# Altium PCB cc2530.PcbDoc
Units mil, origin at the board's own origin, x right, y up, seen from the top; angles counter-clockwise.
Board outline 3937.01 x 2362.2 mil, 2 copper layers (Top Layer, Bottom Layer); 66 components, 49 nets, 234 pads, 105 vias.
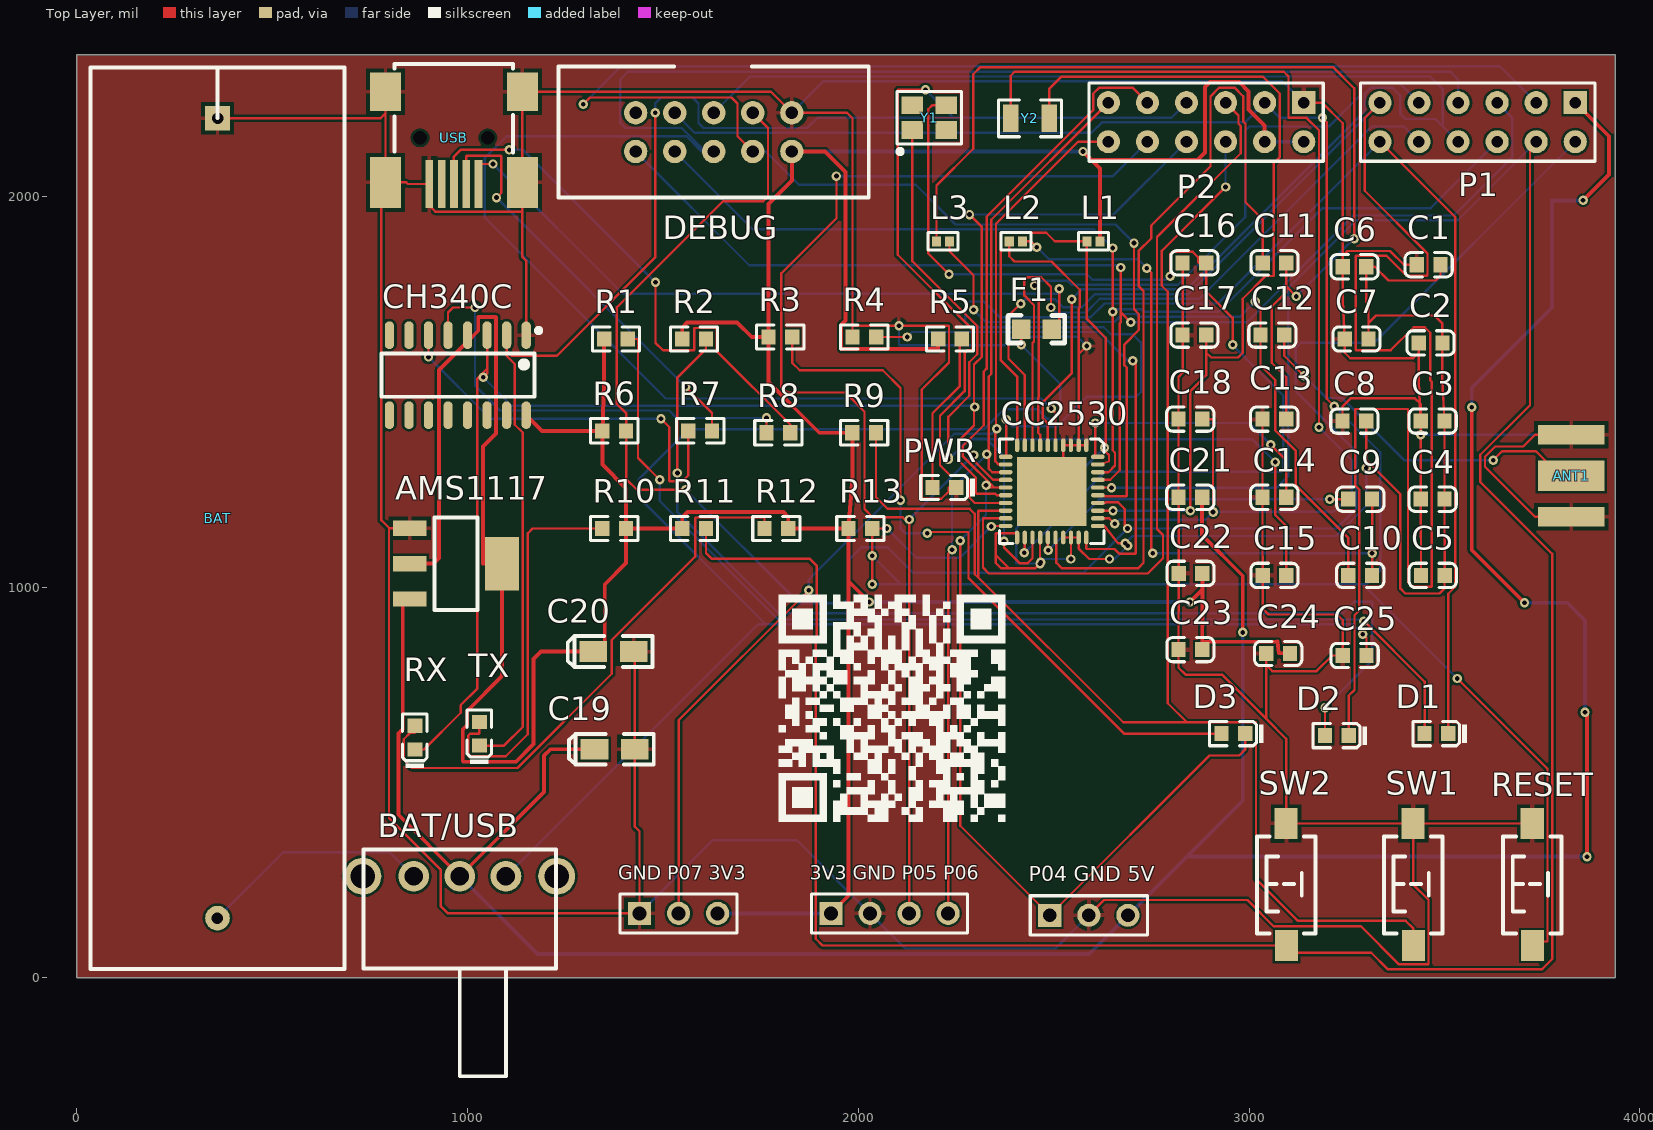
[diagram p0: Top Layer view]
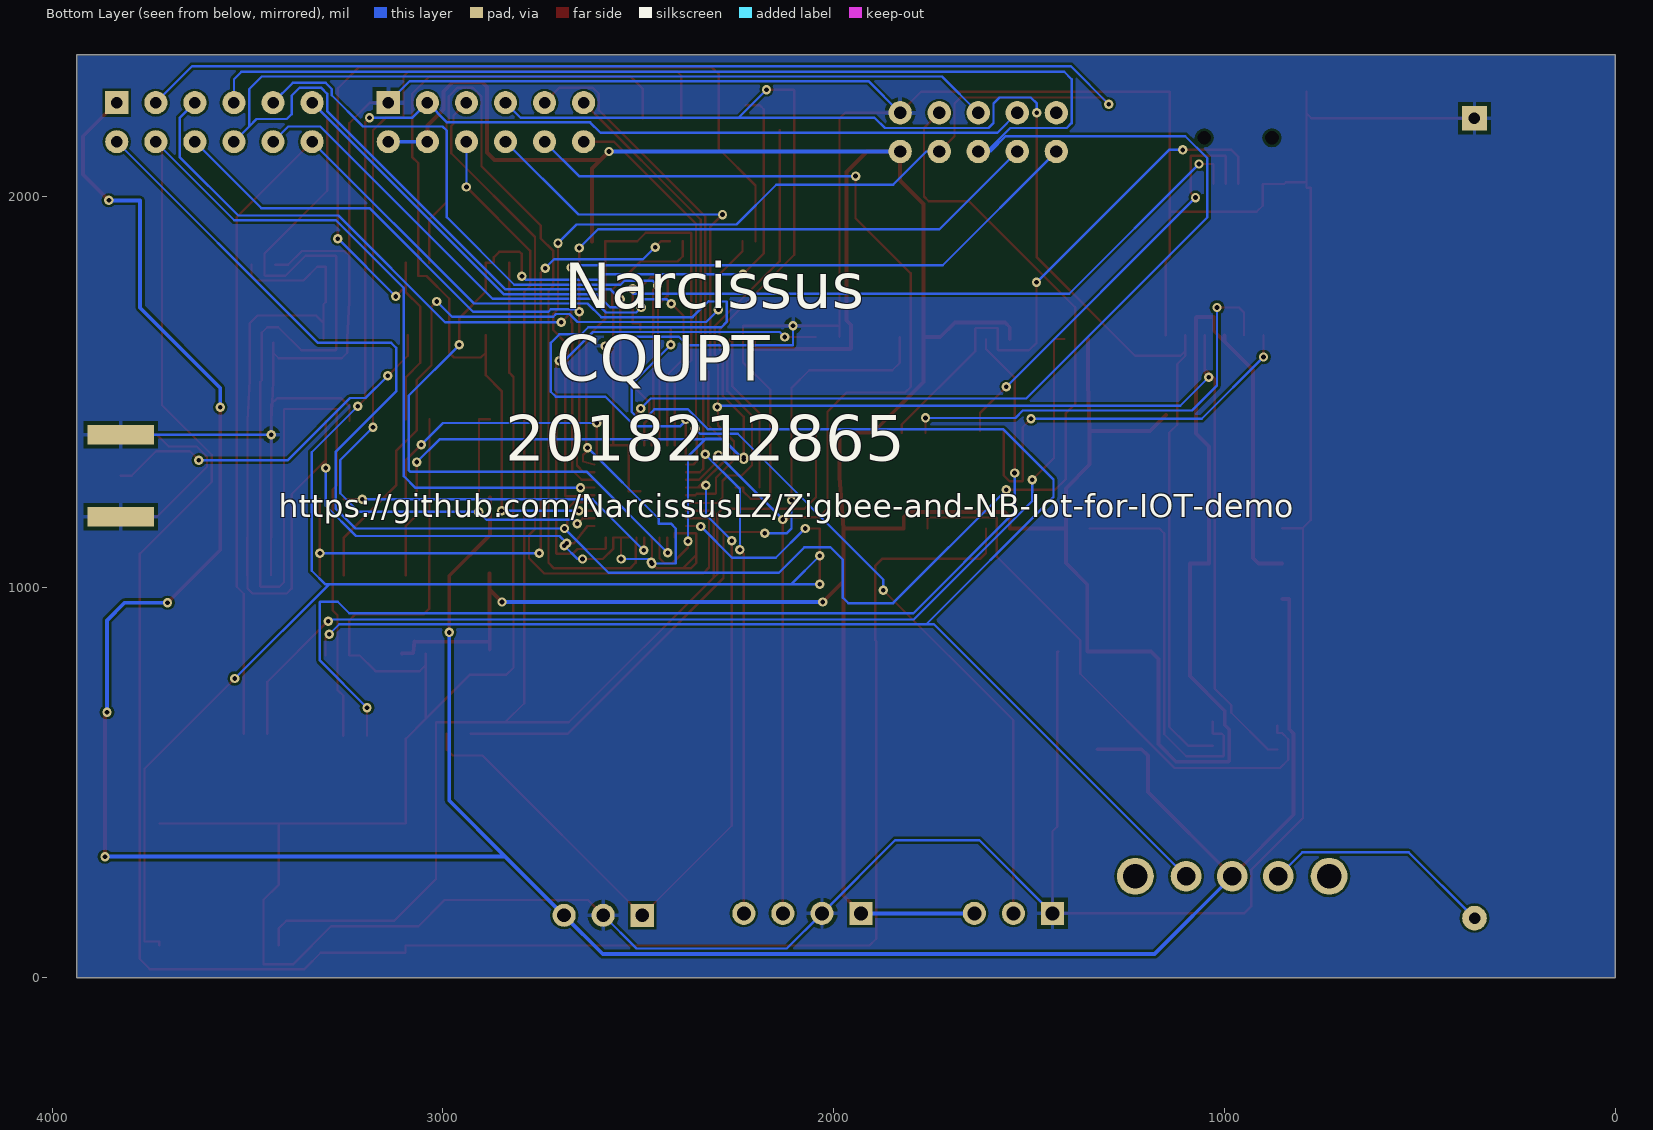
[diagram p1: Bottom Layer view, seen from below]
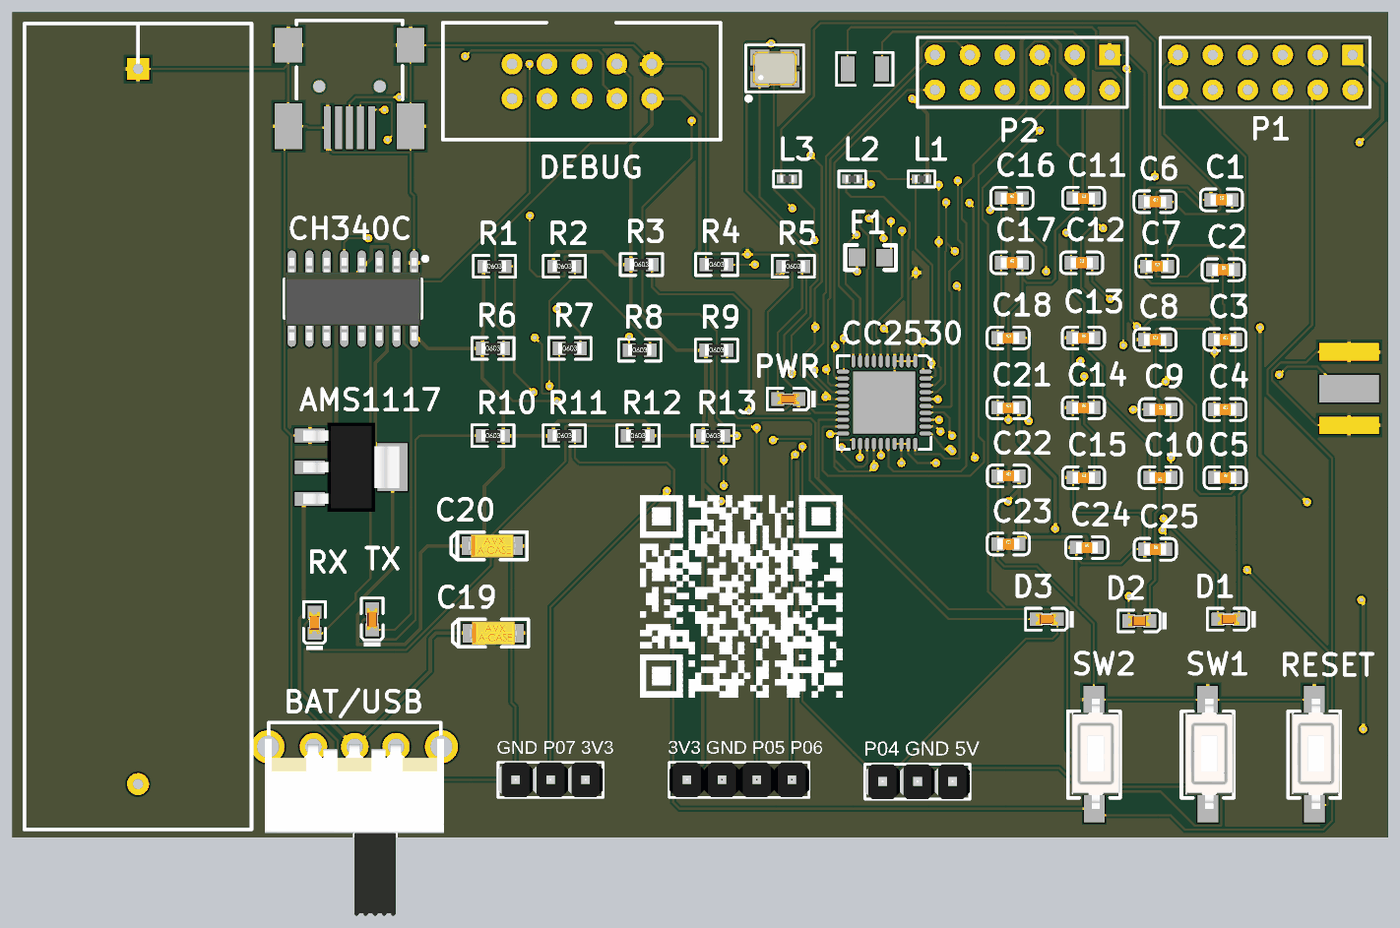
[diagram p2: 3D render of the assembled board from above, using the file's embedded part models]

## Layer stack, top to bottom
Top Solder: solder mask 0.4, Solder Resist, Dk 3.5
Top Layer: signal copper 1.4
Dielectric 1: dielectric 12.6, FR-4, Dk 4.8
Bottom Layer: signal copper 1.4
Bottom Solder: solder mask 0.4, Solder Resist, Dk 3.5

## Board outline
0,0 3937.01,0 3937.01,2362.2 0,2362.2

## Design rules (kind name [scope] priority, off if disabled: settings)
Clearance [All] p1: gap=6 ignorepadtopadclearanceinfootprint=FALSE
PolygonConnect [All] p1: connectstyle=Relief reliefconductorwidth=10 reliefentries=4 polygonreliefangle="90 Angle" airgapwidth=10
RoutingVias [All] p1: holewidth=12 width=24 viastyle="Through Hole" minholewidth=10 minwidth=20 maxholewidth=15 maxwidth=30
SolderMaskExpansion [All] p1: expansion=4
Width Width_1 [(InNet('3V3') OR InNet('5V') )] p1: maxlimit=10 minlimit=10 preferedwidth=10
Width [All] p2: maxlimit=10 minlimit=6 preferedwidth=6
30 further rules are at their usual default settings.

## Components (designator, comment, footprint, x,y, rotation, side; value= is the part's Value field where it differs from the comment)
"3V3 GND P05 P06" "气体感应" HDR1X4 1930,165 r0 top (schematic designator J2)
AMS1117 "AMS1117-3.3" SOT-223 970,1060 r180 top (schematic designator AMS)
ANT1 "SMA" SMA-KE 3825,1285 r180 top
BAT "bat" BAT 684.8,22.83 r90 top
BAT/USB "SS-12F23" SS-12F23 980,260 r270 top (schematic designator S1)
C1 "100nF" 0603_C 3459.69,1825 r0 top
C2 "100nF" 0603_C 3464.69,1625 r0 top
C3 "100nF" 0603_C 3470,1425 r0 top
C4 "220pF" 0603_C 3470,1225 r0 top
C5 "100nF" 0603_C 3470.31,1030 r0 top
C6 "2.2uF" 0603_C 3270,1820 r0 top
C7 "1uF" 0603_C 3275.31,1635 r0 top
C8 "100nF" 0603_C 3269.69,1425 r0 top
C9 "18pF (180) 5% 50V" 0603_C 3284.69,1225 r0 top
C10 "1.0pF" 0603_C 3284.69,1030 r180 top
C11 "18pF (180) 5% 50V" 0603_C 3065.32,1830 r0 top
C12 "2.2pF" 0603_C 3059.68,1645 r0 top
C13 "1.0pF" 0603_C 3064.68,1430 r0 top
C14 "1uF" 0603_C 3064.68,1230 r0 top
C15 "27pF" 0603_C 3065.32,1030 r0 top
C16 "27pF" 0603_C 2860.32,1830 r0 top
C17 "15pF" 0603_C 2860.32,1645 r0 top
C18 "15pF" 0603_C 2849.68,1430 r0 top
C19 "10uF" CASE-A_3216 1376.57,585 r180 top
C20 "10uF" CASE-A_3216 1373.43,835 r180 top
C21 "100nF" 0603_C 2849.68,1230 r0 top
C22 "100nF" 0603_C 2850.32,1035 r0 top
C23 "100nF" 0603_C 2850,840 r0 top
C24 "0.01uF" 0603_C 3074.68,830 r0 top
C25 "100nF" 0603_C 3270.31,825 r0 top
CC2530 "CC2530F256" PVQFN-N40 2583.58,1363.05 r270 top
CH340C "CH340C" SOIC-16_150mil 975,1542.36 r180 top
D1 "白灯 0603" 0603_LED_S1 3479.69,625 r180 top
D2 "白灯 0603" 0603_LED_S1 3224.69,620 r180 top
D3 "白灯 0603" 0603_LED_S1 2959.69,625 r180 top
DEBUG "Debug" DEBUG10 1830,2214 r180 top (schematic designator P3)
F1 "6V 500MA" 0805 2457.6,1653.9 r0 top
"GND P07 3V3" "DHT11" HDR1X3 1440,165 r0 top (schematic designator J3)
L1 "2nH" 0402_L 2601.73,1885 r0 top
L2 "2nH" 0402_L 2403.27,1885 r0 top
L3 "2nH" 0402_L 2216.73,1885 r0 top
P1 "CON2x6" CON2X6 3835,2240 r180 top
P2 "CON2x6" CON2X6 3140,2240 r180 top
"P04 GND 5V" "光敏/继电器" HDR1X3 2490,160 r0 top (schematic designator J1)
PWR "红灯 0603" 0603_LED_S1 2220.32,1255 r180 top
R1 "1KΩ" 0603_R 1379.68,1635 r0 top
R2 "1KΩ" 0603_R 1579.68,1635 r0 top
R3 "1KΩ" 0603_R 1800.31,1640 r0 top
R4 "56KΩ (5602) ±1%" 0603_R 2015.31,1640 r0 top
R5 "1KΩ" 0603_R 2234.68,1635 r0 top
R6 "10KΩ" 0603_R 1375.31,1400 r0 top
R7 "0Ω" 0603_R 1595.31,1400 r0 top
R8 "0Ω" 0603_R 1795.31,1395 r0 top
R9 "10KΩ (1002) ±1%" 0603_R 2015,1395 r0 top
R10 "1KΩ (1001) ±1%" 0603_R 1375.31,1150 r0 top
R11 "10KΩ (1002) ±1%" 0603_R 1579.68,1150 r0 top
R12 "1KΩ (1001) ±1%" 0603_R 1790.31,1150 r0 top
R13 "10KΩ (1002) ±1%" 0603_R 2005.31,1150 r0 top
RESET "6x6x5" "TSW SMD-3*6*2.5" 3725,240 r90 top
RX "绿灯 0603" 0603_LED_S1 865,614.68 r90 top
SW1 "6x6x5" "TSW SMD-3*6*2.5" 3420,240 r90 top
SW2 "6x6x5" "TSW SMD-3*6*2.5" 3095,240 r90 top
TX "绿灯 0603" 0603_LED_S1 1030,624.68 r90 top
USB "Mini USB" "SMT-MINI USB" 965,2150 r270 top
Y1 "32MHZ" SMD-3225_4P 2181.69,2201.5 r0 top
Y2 "32.768KHz" "SMD-3215_2P FC - 135" 2439.21,2200 r180 top

## Footprints (in the part's own frame and the unit in brackets; to place one, negate y for a bottom-side part, rotate by r counter-clockwise, add the part's x,y. Pads: shape width x height; smd on the part's side, far side on the other; paste and mask are expansions set on the pad)
0402_L [mm]
  rect 0.6x0.65 smd mask+0.051: 1(-0.425,0) 2(0.425,0)
  silkscreen extent -0.98,-0.58 0.97,0.58, body extent -0.51,-0.26 0.54,0.26, height 0.36
0603_C [mm]
  rect 0.93x0.98 smd: 1(-0.77,0) 2(0.77,0)
  silkscreen extent -1.53,-0.79 1.54,0.79, body extent -0.8,-0.4 0.8,0.4, height 0.3
0603_LED_S1 [mm]
  rect 0.93x0.98 smd: A(0.77,0) K(-0.77,0)
  silkscreen extent -1.98,-0.79 1.54,0.79, body extent -0.8,-0.4 0.8,0.4, height 0.6
0603_R [mm]
  rect 0.93x0.98 smd: 1(-0.77,0) 2(0.77,0)
  silkscreen extent -1.53,-0.79 1.54,0.79, body extent -0.85,-0.4 0.85,0.4, height 0.56
0805 [mm]
  rect 1.2x1.27 smd: 1(-1.03,0.165) 2(0.95,0.155)
  silkscreen extent -1.89,-0.74 1.79,1.06, body extent -1.02,-0.46 0.98,0.79, height 0.5
BAT [mm]
  round 1.6 hole 0.75: 0(3.302,8.255)
  rect 1.6x1.6 hole 0.75: 1(55.3,8.25)
  silkscreen extent 0,0 58.6,16.51
CASE-A_3216 [mm]
  rect 1.8x1.35 smd: 1(1.31,0) 2(-1.31,0)
  silkscreen extent -2.54,-1 2.97,1, body extent -1.7,-0.84 1.7,0.84, height 1.71
CON2X6 [mm]
  rect 1.5x1.5 hole 0.75: 1(0,0)
  round 1.5 hole 0.75: 2(0,2.54) 3(2.54,0) 4(2.54,2.54) 5(5.08,0) 6(5.08,2.54) 7(7.62,0) 8(7.62,2.54) 9(10.16,0) 10(10.16,2.54) 11(12.7,0) 12(12.7,2.54)
  silkscreen extent -1.27,-1.27 13.97,3.81
DEBUG10 [mil]
  round 60 hole 31.5: 1(0,0) 2(0,99) 3(100,0) 4(100,99) 5(200,0) 6(200,99) 7(300,0) 8(300,99) 9(400,0) 10(400,99)
  silkscreen extent -197,-118 598,217
HDR1X3 [mm] "Connector; Header; 3 Position"
  rect 1.5x1.5 hole 0.9: 1(0,0)
  round 1.5 hole 0.9: 2(2.54,0) 3(5.08,0)
  silkscreen extent -1.27,-1.27 6.35,1.27, body extent -1.27,-1.27 6.35,1.27, height 8.38
HDR1X4 [mm] "Connector; Header; 4 Position"
  rect 1.5x1.5 hole 0.9: 1(0,0)
  round 1.5 hole 0.9: 2(2.54,0) 3(5.08,0) 4(7.62,0)
  silkscreen extent -1.27,-1.27 8.89,1.27, body extent -1.27,-1.27 8.89,1.27, height 8.38
PVQFN-N40 [mm]
  oval 0.889x0.28 smd: 1(0,0) 2(0,-0.5) 3(0,-1) 4(0,-1.5) 5(0,-2) 6(0,-2.5) 7(0,-3) 8(0,-3.5) 9(0,-4) 10(0,-4.5) 21(5.994,-4.5) 22(5.994,-4) 23(5.994,-3.5) 24(5.994,-3) 25(5.994,-2.5) 26(5.994,-2) 27(5.994,-1.5) 28(5.994,-1) 29(5.994,-0.5) 30(5.994,0)
  oval 0.28x0.889 smd: 11(0.748,-5.248) 12(1.248,-5.248) 13(1.748,-5.248) 14(2.248,-5.248) 15(2.748,-5.248) 16(3.248,-5.248) 17(3.748,-5.248) 18(4.248,-5.248) 19(4.748,-5.248) 20(5.248,-5.248) 31(5.248,0.749) 32(4.748,0.749) 33(4.248,0.749) 34(3.748,0.749) 35(3.248,0.749) 36(2.748,0.749) 37(2.248,0.749) 38(1.748,0.749) 39(1.248,0.749) 40(0.748,0.749)
  rect 4.5x4.5 smd: 41(2.998,-2.25)
  silkscreen extent -0.4,-5.65 6.4,1.15
SMA-KE [mil]
  rect 170x78.74 smd: 1(0,0)
  rect 170x50 all layers, no hole: 2(0,105) 3(0,-105)
"SMD-3215_2P FC - 135" [mm]
  rect 1x1.8 smd: 1(-1.25,0) 2(1.25,0)
  silkscreen extent -2.05,-1.2 2.05,1.2
SMD-3225_4P [mm]
  rect 1.4x1.15 smd: 1(-1.1,-0.8) 2(1.1,-0.8) 3(1.1,0.8) 4(-1.1,0.8)
  silkscreen extent -2.1,-2.35 2.1,1.7, body extent -1.6,-1.25 1.6,1.25, height 0.61
"SMT-MINI USB" [mm]
  rect 3.1x0.5 smd: 1(3,1.6) 2(3,0.8) 3(3,0) 4(3,-0.8) 5(3,-1.6)
  rect 3.3x2 smd: 6(2.9,-4.45) 8(2.9,4.45)
  rect 2.5x2 smd: 7(-3,-4.45) 9(-3,4.45)
  rect 0x0 hole 0.9: 10(0,2.2) 11(0,-2.2)
  silkscreen extent -4.8,-3.85 0.95,3.85
SOIC-16_150mil [mm]
  oval 0.6x1.8 smd: 1(-4.445,-2.6) 2(-3.175,-2.6) 3(-1.905,-2.6) 4(-0.635,-2.6) 5(0.635,-2.6) 6(1.905,-2.6) 7(3.175,-2.6) 8(4.445,-2.6) 9(4.445,2.6) 10(3.175,2.6) 11(1.905,2.6) 12(0.635,2.6) 13(-0.635,2.6) 14(-1.905,2.6) 15(-3.175,2.6) 16(-4.445,2.6)
  silkscreen extent -5.4,-3.05 4.97,1.4, body extent -4.95,-2.97 4.95,3.03, height 1.75
SOT-223 [mm]
  rect 2.2x1 smd: 1(3,-2.3) 2(3,0) 3(3,2.3)
  rect 2.2x3.5 smd: 2(-3,0)
  silkscreen extent -1.4,-3 1.4,3, body extent -3.49,-3.24 3.49,3.24, height 1.64
SS-12F23 [mm] "脚距3mm"
  round 2.4 hole 1.6: 0(0,6.3) 0(0,-6.3)
  round 2 hole 1.2: 1(0,3) 2(0,0) 3(0,-3)
  silkscreen extent -1.75,-6.25 13,6.25, body extent -0.61,-6.52 12.29,6.48, height 5.75
"TSW SMD-3*6*2.5" [mm] "3*6*2.5mm"
  rect 2x1.5 smd: 1(-3.996,-0.02) 2(3.937,0)
  silkscreen extent -3.21,-1.9 3.09,1.9, body extent -4,-1.88 4,1.62, height 2.59

## Part data
"3V3 GND P05 P06": library part CON4, "连接器"
AMS1117: library part "SOT-223 AMS1117-3.3", "低压差线性稳压(LDO)", Package=SOT-223, SuppliersPartNumber=C6186, ComponentLink1Description=供应商, ComponentLink1URL=http://www.szlcsc.com/product/details_6652.html, Supplier=LC
BAT/USB: library part SSW-1P, "1路波动开关"
C1 C2 C3 C5 C8 C14 C15 C16 C17 C18 C21 C22 C23 C24 C25: library part "0603 100nF (104) 10% 50V", "贴片电容", Package=0603, SuppliersPartNumber=C14663, ComponentLink1Description=供应商, ComponentLink1URL=http://www.szlcsc.com/product/details_15331.html, Supplier=LC
C4: library part "0603 220pF (221) 10% 50V", "贴片电容", Package=0603, SuppliersPartNumber=C1603, ComponentLink1Description=供应商, ComponentLink1URL=http://www.szlcsc.com/product/details_1955.html, Supplier=LC
C6 C12: library part "0603 2.2uF (225) 10% 16V", "贴片电容", Package=0603, SuppliersPartNumber=C23630, ComponentLink1Description=供应商, ComponentLink1URL=http://www.szlcsc.com/product/details_24366.html, Supplier=LC
C7: library part "0603 1uF (105) 10% 50V", "贴片电容", Package=0603, SuppliersPartNumber=C15849, ComponentLink1Description=供应商, ComponentLink1URL=http://www.szlcsc.com/product/details_16531.html, Supplier=LC
C9 C11: library part "0603 18pF (180) 5% 50V", "贴片电容", Package=0603, SuppliersPartNumber=C1647, ComponentLink1Description=供应商, ComponentLink1URL=http://www.szlcsc.com/product/details_1999.html, Supplier=LC
C10 C13: library part "0805 1.0pF (010) 0.25pF 50V", "贴片电容", Package=0805, SuppliersPartNumber=C14971, ComponentLink1Description=供应商, ComponentLink1URL=http://www.szlcsc.com/product/details_15644.html, Supplier=LC
C19 C20: library part "3216 10uF (106) 10% 16V", "钽电容", Package=3216, SuppliersPartNumber=C7171, ComponentLink1Description=供应商, ComponentLink1URL=http://www.szlcsc.com/product/details_7643.html, Supplier=LC
CC2530: library part CC2530
D1 D2 D3: library part "0603 白灯", "发光二极管", Package=0603, SuppliersPartNumber=C2290, ComponentLink1Description=供应商, ComponentLink1URL=http://www.szlcsc.com/product/details_2663.html, Supplier=LC
DEBUG: library part "Header 5X2", "Header, 5-Pin, Dual row"
F1: library part FUSE, "保险丝"
"GND P07 3V3" "P04 GND 5V": library part CON3, "连接器"
L1 L2 L3: library part "0402 2.7nH 0.3nH", "贴片电感", Package=0402, SuppliersPartNumber=C27123, ComponentLink1Description=供应商, ComponentLink1URL=http://www.szlcsc.com/product/details_27872.html, Supplier=LC
PWR: library part "0603 红灯", "发光二极管", Package=0603, SuppliersPartNumber=C2286, ComponentLink1Description=供应商, ComponentLink1URL=http://www.szlcsc.com/product/details_2659.html, Supplier=LC
R1 R2 R3 R5: library part "0603 1.1KΩ (1101) 1%", "贴片电阻", Package=0603, SuppliersPartNumber=C22764, ComponentLink1Description=供应商, ComponentLink1URL=http://www.szlcsc.com/product/details_23491.html, Supplier=LC
R4: library part "0603 56KΩ (5602) 1%", "贴片电阻", Package=0603, SuppliersPartNumber=C23206, ComponentLink1Description=供应商, ComponentLink1URL=http://www.szlcsc.com/product/details_23933.html, Supplier=LC
R6 R9 R11 R13: library part "0603 10KΩ (1002) 1%", "贴片电阻", Package=0603, SuppliersPartNumber=C25804, ComponentLink1Description=供应商, ComponentLink1URL=http://www.szlcsc.com/product/details_26547.html, Supplier=LC
R7 R8: library part "0603 0Ω (0R0) 1%", "贴片电阻", Package=0603, SuppliersPartNumber=C21189, ComponentLink1Description=供应商, ComponentLink1URL=http://www.szlcsc.com/product/details_21903.html, Supplier=LC
R10 R12: library part "0603 1KΩ (1001) 1%", "贴片电阻", Package=0603, SuppliersPartNumber=C21190, ComponentLink1Description=供应商, ComponentLink1URL=http://www.szlcsc.com/product/details_21904.html, Supplier=LC
RESET SW1 SW2: library part "TSW DIP-6x6_V", "侧按直插6x6轻触开关"
RX TX: library part "0603 绿灯", "发光二极管", Package=0603, SuppliersPartNumber=C72043, ComponentLink1Description=供应商, ComponentLink1URL=http://www.szlcsc.com/product/details_73152.html, Supplier=LC
USB: library part USB-1, "IC", Manufacturer Part Number="USB Plug P/N: MUSB-B5-S-VT-02", ComponentLink1Description="Manufacturer Link", Published=NOV.13,2009, Publisher1="Stephen Lui", Publisher2=Tianshen
Y1: library part "SMD-3225_4P  25MHZ 12PF 10PPM", "贴片晶振", Package=SMD-3225_4P, SuppliersPartNumber=C9006, ComponentLink1Description=供应商, ComponentLink1URL=http://www.szlcsc.com/product/details_9526.html, Supplier=LC
Y2: library part "SMD-3215_2P 32.768KHz 20ppm 12.5pF", "贴片晶振", Package=SMD-3215_2P, SuppliersPartNumber=C32346, ComponentLink1Description=供应商, ComponentLink1URL=http://www.szlcsc.com/product/details_33310.html, Supplier=LC
CH340C: 唯一出售店铺网址=https://shop463601444.tao, 技术支持，联系售后=封装库

## Via types
v1: diameter 24, hole 12, Top Layer to Bottom Layer, 105 vias

## Nets (pads, with @x,y where several pads share a name; then routed paths per layer and width w, separated by ;. In a path a pad name is that pad's centre, name@x,y a point inside that pad or via, vN(x,y) a via of type N, cw(c..) or ccw(c..) an arc to the next point about the centre after c; other vN are vias at no path point)
3V3: "3V3 GND P05 P06.1" "GND P07 3V3.3" AMS1117.2 C20.1 C22.2 C23.2 C24.2 CH340C.4 CH340C.16 DEBUG.2 L1.2 P2.2 P2.4 R1.1 R2.1 R3.1 R5.1 R6.1 R9.1 R10.2 R11.1 R12.2 R13.1 | length 11170
  Top Layer w10: AMS1117.2@851.89,1060 912.5,1060 927,1074.5 927,1555.98 CH340C.4@1000,1628.98 ; CH340C.4 CH340C.4@1000,1628.98 ; CH340C.16 1190,1400 R6.1 ; R1.1 1349.37,1521.37 R6.1 ; R2.1 1549.37,1665 1561.66,1677.29 1690,1677.29 1727.29,1640 R3.1 ; 1930,165 1975,210 1975,1015 ; v1(2028,962) 1975,1015 ; R5.1 2204.37,1610 2203.37,1609 1956.69,1609 1955.69,1610 1955.69,1671 1967,1682.31 1967,2062.5 1914.5,2115 DEBUG.2 1830,2041 1770,1981 R3.1 ; v1(2575,2115) 2597,2093 ; L1.2 2618.46,2071.54 2597,2093 ; v1(2849,962) 2880.63,993.63 ; C22.2 2880.63,993.63 ; P2.4 3040,2181 2999,2222 2999,2268.53 2975,2292.53 2900,2292.53 2887.47,2280 2887.47,2112.5 2867.97,2093 2597,2093 ; C24.2 3076,831 3073,861 2880.38,860 ; CH340C.4@1000,1628.98 1027.19,1656.17 1027.19,1690 1028.35,1691.16 1071.65,1691.16 1072.81,1690 1072.81,1393.57 1039.13,1359.88 1039.13,1060.5 1039.63,1060 1088.11,1060 1088.11,772.42 999,683.31 999,646.97 987.71,635.68 987.71,554.35 989,553.06 1124.06,553.06 1169,598 1169,816.5 1187.5,835 C20.1 1351,835 1351,1007 1405.63,1061.63 R10.2 ; R6.1 1345,1313.48 1405.63,1252.85 R10.2 ; R10.2 R11.1 1549.37,1179 1562.66,1192.29 1808.34,1192.29 1820.63,1180 R12.2 R13.1 ; R3.1 1770,1525 1900,1395 R9.1 1984.69,1281.69 R13.1 ; 1975,1015 R13.1 ; 2880.38,860 2880.32,860 C23.2 2880.38,860 ; 2880.38,860 2880.63,937.31 2880.63,993.63
  Bottom Layer w10: 1640,165 1930,165 ; DEBUG.2 v1(2575,2115) ; v1(2028,962) v1(2849,962) ; P2.4 P2.2
5V: "P04 GND 5V.3" AMS1117.3 BAT/USB.2 C19.1 C21.2 P1.1 | length 7768.2
  Top Layer w10: AMS1117.3 834,969.45 834,636.97 822.71,625.68 822.71,417.29 BAT/USB.2 1196,476 1196,568.5 1212.5,585 C19.1 ; C21.2 2880,1133 2984,1029 v1(2984,884) ; v1(3570,1460) 3570,1095 v1(3705,960) ; P1.1 3921,2154 3921,2056 v1(3855,1990) ; v1(3860,680) 3865,675 v1(3865,310)
  Bottom Layer w10: BAT/USB.2 1179,61 2591,61 2690,160 2841,311 ; v1(2984,884) 2984,454 2841,311 ; v1(3570,1460) 3570,1510 3775,1715 3775,1990 v1(3855,1990) ; v1(3705,960) 3815,960 3860,915 v1(3860,680) ; v1(3865,310) 2842,310 2841,311
GND: "3V3 GND P05 P06.2" "GND P07 3V3.1" "P04 GND 5V.2" AMS1117.1 ANT1.2 ANT1.3 BAT.1 C1.1 C2.1 C3.1 C4.1 C5.1 C6.1 C7.1 C8.1 C13.1 C14.1 C15.1 C16.1 C17.1 C18.1 C19.2 C20.2 C21.1 C22.1 C23.1 C24.1 C25.1 CC2530.1 CC2530.2 CC2530.3 CC2530.4 CC2530.41 CH340C.1 DEBUG.1 L2.1 P2.1 PWR.K R4.1 RESET.2 SW1.2 SW2.2 USB.5 USB.6 USB.7 USB.8 USB.9 | length 19009.3
  Top Layer w6: BAT.1 777.3,2200 789.8,2212.5 ; USB.7 789.8,2212.5 ; AMS1117.1 800,1150.55 ; CH340C.1 1150,1835 1140.2,1844.8 1140.2,1962 ; C20.2 1428.15,835 C19.2 1428.15,386.85 1440,375 1440,165 950,165 931,184 931,277 799,409 799,1149.55 800,1150.55 ; R4.1 1985,1668 ; PWR.K 2232.31,1255 2231.31,1254 2231.31,1244.81 2212.5,1226 2163,1226 2162,1227 2162,1505 2232,1575 2232,1668 2231,1669 v1(2104,1669) 1986,1669 1985,1668 ; L2.1 2386.54,1846.93 2400,1833.46 2494.51,1833.46 2567,1760.98 2567,1716 2563.9,1712.9 2563.9,1595.9 ; CC2530.41 2524.53,1245 CC2530.4 CC2530.3 CC2530.2 ; CC2530.1 CC2530.2 ; v1(2585,1617) 2563.9,1595.9 ; 2590,160 2629,199 2996,199 3063,132 3286.26,132 3383.94,34.31 3458,34.31 3459.32,35.63 3459.32,199.68 3420,239 SW1.2 ; C16.1 C17.1 2830,1548.63 2819.37,1538 C18.1 C21.1 2819.37,1204.63 2820,1204 C22.1 2820,937.31 2819.69,937 C23.1 2819.69,793.81 2837.5,776 2931,776 3044.37,662.63 ; C13.1 C14.1 3034.37,1130.63 C15.1 3035,945 3050,930 3225,930 3240,915 C25.1 3213,825 3173,785 3059.37,785 3044.37,800 ; C24.1 3044.37,800 ; P2.1 3187,2240 3239.69,2187.31 3239.69,1848 ; C8.1 3239.37,1462.5 3259.87,1483 3425,1483 3437.31,1470.69 ; C1.1 3396.41,1825 3361.12,1860.29 3251.98,1860.29 3239.69,1848 ; C2.1 3434.37,1600 ; C5.1 3440,1127 3439.69,1127.31 C4.1 v1(3439.69,1390) C3.1 ; RESET.2 SW1.2 ; ANT1.2 3732,1180 3604,1308 3604,1333.7 3630.3,1360 3702,1360 3732,1390 ANT1.3 ; USB.6 789.8,2022 779,2022 779,1171.55 800,1150.55 ; USB.6 789.8,2212.5 ; USB.6 843,2035.83 846.94,2031.89 USB.5 902.01,1975.99 917,1961 1139.2,1961 1140.2,1962 ; 1140.2,1962 USB.8 USB.9 1775.89,2268.11 DEBUG.1 1971,2214 1985,2200 1985,1668 ; CC2530.2 2563.9,1595.9 ; 3044.37,662.63 3044.37,800 ; 3044.37,662.63 3095,612 SW2.2 SW1.2 ; 3239.69,1848 C6.1 3239.69,1732.31 C7.1 3245,1600 3259.13,1585.87 3420.24,1585.87 3434.37,1600 ; 3434.37,1600 3434.37,1527.32 3437.31,1470.69 ; 3437.31,1470.69 C3.1 ; 3437.31,1470.69 3439.69,1468.31 C3.1
  Bottom Layer w6: 1440,165 1627,352 1843,352 2030,165 2120,75 2505,75 2590,160 ; DEBUG.1 1911,2295 3085,2295 P2.1 ; v1(2104,1669) 2104,1620 2105,1619 2374,1619 2396,1641 2561,1641 v1(2585,1617) ; v1(3439.69,1390) ANT1.3
NetANT1_1: ANT1.1 C12.2 | length 934.2
  Top Layer w6: C12.2 3090,1592 v1(3141,1541) ; v1(3625,1325) 3648,1348 3734,1348 3797,1285 ANT1.1
  Bottom Layer w6: v1(3141,1541) 3198,1484 3238,1484 3397,1325 v1(3625,1325)
NetBAT_0: BAT.0 BAT/USB.3 | length 597
  Bottom Layer w6: BAT.0 527.97,321 800.89,321 BAT/USB.3
NetC1_2: C1.2 C2.2 C3.2 C4.2 C5.2 C6.2 C7.2 C8.2 CC2530.10 CC2530.21 CC2530.24 CC2530.27 CC2530.28 CC2530.29 CC2530.31 CC2530.39 L1.1 | length 5515.8
  Top Layer w6: CC2530.21 2406.42,1138 2353,1138 2352,1137 2352,1082.55 ; CC2530.10 2406.42,1538.73 2365,1580.14 2365,1905.8 2366,1906.8 2481.2,1906.8 2503,1885 L1.1 2585,1686 2633,1638 2633,1357 v1@2633,1346.64 ; v1(2467,1064) v1@2465,1062 ; CC2530.27 CC2530.28 ; v1(2544.21,1072) CC2530.28 ; CC2530.31 2629.9,1156.42 2664.75,1112.25 v1(2683.25,1112.25) v1(2689.5,1106) ; CC2530.39 2641.54,1321.54 2641.54,1338.11 v1@2633,1346.64 ; v1(2630,1357) v1@2633,1346.64 ; v1(2643,1072) 2590.9,1072 2563.9,1099 CC2530.29 CC2530.28 ; v1(3300,1305) 3300,1325 ; C8.2 3300,1325 ; C7.2 3305.63,1675.63 ; C1.2 3490,1797 3477.71,1784.71 3357.29,1784.71 3322,1820 C6.2 3300.32,1729.31 3305.63,1724 3305.63,1675.63 ; C5.2 3500.63,1127 3500.32,1127.31 ; 2352,1082.55 2352,1062 2365.5,1048.5 2386.05,1048.5 ; 2352,1082.55 2386.05,1048.5 ; 2386.05,1048.5 2451.5,1048.5 ; 2451.5,1048.5 v1@2465,1062 ; 2451.5,1048.5 2453.5,1048.5 v1(2465,1060) v1@2465,1062 ; v1@2465,1062 2465,1064 CC2530.24@2465,1121 ; CC2530.24@2465,1121 2465.47,1121 CC2530.24 CC2530.24@2465,1121 ; 3300,1325 3387.5,1237.5 3387.5,996.13 3400,983.63 3487.5,983.63 3500.32,996.45 3500.32,1127.31 ; 3305.63,1675.63 3325,1695 3475,1695 3495,1675 C2.2 3495,1530.32 C3.2 3500.32,1325 C4.2 3500.32,1127.31
  Bottom Layer w6: v1(2465,1060) 2404,1061 2404,1150 2416.5,1162.5 2448,1162.5 2448,1175 v1(2630,1357) ; v1(2467,1064) 2475,1072 v1(2544.21,1072) ; v1(2643,1072) 2655.5,1072 v1(2689.5,1106) ; v1(2683.25,1112.25) 2702,1131 3223,1131 3300,1208 v1(3300,1305)
NetC9_1: C9.1 CC2530.25 | length 856
  Top Layer w6: CC2530.25 2485.16,1094.84 v1(2486,1094) ; v1(3206.87,1225) C9.1
  Bottom Layer w6: v1(2486,1094) 2617,1225 v1(3206.87,1225)
NetC9_2: C9.2 C10.1 L2.2 | length 1838.8
  Top Layer w6: L2.2 2442,1885 v1(2457,1870) ; v1(2738.5,1816.5) 2750.17,1804.83 2750.17,1090.83 v1(2754,1087) ; C10.1 v1(3315,1087) 3315,1127 C9.2
  Bottom Layer w6: v1(2457,1870) 2488,1839 2716,1839 v1(2738.5,1816.5) ; v1(2754,1087) v1(3315,1087)
NetC10_2: C10.2 C12.1 L3.2 | length 1761.7
  Top Layer w6: L3.2 2233.46,1859.54 2295,1798 v1(2295,1710) ; v1(3016,1731) 3029.37,1717.63 C12.1 3029.37,1567.63 3067,1530 3067,1401 3120,1348 3120,1260 3254.37,1125.63 C10.2
  Bottom Layer w6: v1(2295,1710) 2326.41,1678.59 2655.59,1678.59 2676,1699 2711,1699 2718,1692 2977,1692 v1(3016,1731)
NetC11_1: C11.1 CC2530.26 | length 2124.2
  Top Layer w6: CC2530.26 2504.84,1115 2507,1112.84 2507,1062.5 2521.5,1048 2715.5,1048 2730,1062.5 2730,1758 2717.5,1770.5 2717.5,1860 2750,1892.5 2750,1925.5 2901.47,2076.97 2901.47,2255.96 2924.04,2278.53 2962.5,2278.53 2985,2256.03 2985,2192 2991,2186 2991,1985 3035,1941 C11.1
NetC11_2: C11.2 C13.2 L3.1 | length 2532.6
  Top Layer w6: L3.1 2200,2028 2294,2122 2294,2312.5 2312.5,2331 3215,2331 3269,2277 v1(3269,1892) ; C13.2 3095,1537 3058,1574 3058,1718 3095.63,1755.63 3095.63,1769.37 ; C11.2 3095.63,1769.37 ; v1(3121,1744) 3095.63,1769.37
  Bottom Layer w6: v1(3121,1744) v1(3269,1892)
NetC14_2: C14.2 CC2530.40 | length 715.9
  Top Layer w6: v1(2606.5,1420) 2606.5,1333.58 CC2530.40 ; v1(3056,1364) 3095,1325 C14.2
  Bottom Layer w6: v1(2606.5,1420) 3000,1420 v1(3056,1364)
NetC15_2: C15.2 CC2530.23 Y1.1 | length 2692.3
  Top Layer w6: Y1.1 2138.39,1834.11 2304.31,1668.19 2304.31,1596 2284,1575.69 2284,1489.7 2230,1435.7 v1(2230,1332.61) v1(2230,1326.67) ; v1(2373,1117) 2373,1101 2412.5,1061.5 2433.5,1061.5 2446,1074 2446,1115.34 CC2530.23 ; v1(3067,1320) 3067,1184.63 3095.63,1156 C15.2
  Bottom Layer w6: v1(2230,1326.67) v1@2232.97,1329.64 ; v1(2230,1332.61) v1@2232.97,1329.64 ; v1(2373,1117) 2373,1334.39 2329.3,1378.09 ; v1(3067,1320) 3008.91,1378.09 2329.3,1378.09 ; v1@2232.97,1329.64 2281.42,1378.09 2284.61,1378.09 ; v1@2232.97,1329.64 2233.61,1329 2284.61,1378.09 ; 2284.61,1378.09 2329.3,1378.09 ; 2284.61,1378.09 2287,1380.39 2327,1380.39 2329.3,1378.09
NetC16_2: C16.2 CC2530.22 Y1.3 | length 2642.3
  Top Layer w6: Y1.3 2189,2232.99 2179,2222.99 2179,1854 v1(2232,1801) ; v1(2425,1088.11) 2426.1,1089.21 CC2530.22 ; v1(2798,1796) 2798,1852.31 2803.98,1858.29 2855.71,1858.29 2870,1844 2870,1831 2871,1830 C16.2 2890.63,1756.37 2958,1689 v1(2958,1620)
  Bottom Layer w6: v1(2232,1801) 2585,1801 2599,1787 2789,1787 v1(2798,1796) ; v1(2425,1088.11) 2631.78,1294.89 3082.89,1294.89 3088,1300 3088,1490 v1(2958,1620)
NetCC2530_30: CC2530.30 R4.2 | length 1349.6
  Top Layer w6: R4.2 v1(2125,1640) ; CC2530.30 2583.58,1098.92 2585,1097.5 2656,1097.5 2668.5,1085 2708,1085 2710.5,1087.5 2710.5,1571 v1(2702.5,1579)
  Bottom Layer w6: v1(2125,1640) 2138,1653 2616,1653 2690,1579 v1(2702.5,1579)
NetD1_A: D1.A R1.2 | length 2745.1
  Top Layer w6: R1.2 1435,1635 1436,1634 1436,1330.44 v1(1491.74,1274.7) ; v1(3294,913) 3449.37,757.63 D1.A
  Bottom Layer w6: v1(1491.74,1274.7) 1491.74,1220.26 1795,917 3290,917 v1(3294,913)
NetD2_A: D2.A R2.2 | length 2762.9
  Top Layer w6: v1(1537,1292) 1537,1536.6 1610,1609.6 R2.2 ; D2.A v1(3194.37,691.37)
  Bottom Layer w6: v1(1537,1292) 1537,1192 1796,933 3240,933 3269.5,962.5 3314.5,962.5 3315,962 3315,812 v1(3194.37,691.37)
NetD3_A: D3.A R3.2 | length 1839.6
  Top Layer w6: R3.2 1830.63,1574.37 1850,1555 2062.5,1555 2108,1509.5 v1(2108,1222) ; v1(2176.5,1137.5) 2180,1141 2281,1141 2282,1140 2282,1023 2680,625 D3.A
  Bottom Layer w6: v1(2108,1222) 2108,1150 2120.5,1137.5 v1(2176.5,1137.5)
NetF1_2: F1.2 USB.1 | length 1809.1
  Top Layer w6: USB.1 1027.99,2083 v1(1065,2083) ; F1.2 2495,1675 2514,1675 v1(2514,1763.5)
  Bottom Layer w6: v1(1065,2083) 1397,1751 2513,1751 2514,1752 v1(2514,1763.5)
NetPWR_A: PWR.A R5.2 | length 414
  Top Layer w6: PWR.A 2190,1445 2260,1515 2260,1630.71 2265,1630.71 R5.2
NetR7_2: R7.2 USB.2 | length 1097.9
  Top Layer w6: USB.2 996.5,2103 997.5,2104 1085,2104 1086,2103 1086,2009 v1(1074,1997) ; v1(1558,1513) 1625.63,1445.37 R7.2
  Bottom Layer w6: v1(1074,1997) v1(1558,1513)
NetR8_2: R8.2 USB.3 | length 1454.4
  Top Layer w6: USB.3 965,2102 982,2119 v1(1107,2119) ; v1(1481,1780) 1481,1625 1500,1606 1579,1606 1580,1607 1580,1662.29 1581,1663.29 1636.02,1663.29 1637.31,1662 1637.31,1604.16 1825.63,1415.84 R8.2
  Bottom Layer w6: v1(1107,2119) 1142,2119 v1(1481,1780)
NetR10_1: R10.1 TX.A | length 998.4
  Top Layer w6: TX.A 1030,625.68 1029,624.68 1006,624.68 1001.71,620.39 1001.71,568.35 1003,567.06 1097.84,567.06 1154,623.22 1154,1137.5 1166.5,1150 R10.1
NetR12_1: R12.1 RX.A | length 1439.6
  Top Layer w6: RX.A 865,626.5 852.82,626.5 836.71,610.39 836.71,558 857.71,537 1127.8,537 1369,778.2 1369,864.31 1582.69,1078 1582.69,1177 1583.98,1178.29 1759,1178.29 1760,1177.29 R12.1
P0_0: CC2530.19 P2.5 | length 1944.2
  Top Layer w6: CC2530.19 2320,1176.1 2319,1175.1 2319,1050 2334,1035 2741,1035 2780,1074 2780,1133 2764.62,1148.38 2764.62,1896 2979,2110.38 2979,2180 2973,2186 2973,2207 P2.5
P0_1/BTN1: CC2530.18 P2.6 R9.2 SW1.1 | length 4710.7
  Top Layer w6: R9.2 2045.32,1230.18 2074.88,1200.62 2284.88,1200.62 2298,1187.5 2298,1033 2678,654 ; CC2530.18 2308,1195.79 2307,1194.79 2307,1025 2678,654 ; v1(2940,2024) 2776.62,1860.62 2776.62,1771.41 2792,1756.03 2792,703 2841,654 ; SW1.1 3420.79,126 3401.04,145.75 3125.25,145.75 3018,253 3018,653 3017,654 2841,654 ; 2678,654 2841,654
  Bottom Layer w6: v1(2940,2024) P2.6
P0_2/RX: CC2530.17 CH340C.2 P2.7 TX.K | length 4974.9
  Top Layer w6: TX.K 1093.11,594.37 1141,642.26 1141,1395.57 1120.81,1415.75 1120.81,1571 1100,1591.81 1100,1604.5 ; CH340C.2 1100,1604.5 ; v1(1480,2214) 1480,1843.5 1228.5,1592 1112.5,1592 1100,1604.5 ; v1(2172,2273) 2102,2273 2101,2272 2101,1850.48 2292.31,1659.17 2292.31,1608 2291.02,1606.71 2279.71,1606.71 2272,1599 2272,1501.7 2209,1438.7 2209,1311.83 2235.08,1285.75 2270.75,1285.75 2284.75,1271.75 2284.75,1228.55 2297.84,1215.47 CC2530.17
  Bottom Layer w6: v1(1480,2214) 1480,2237.5 1495.5,2253 1575.5,2253 1591,2237.5 1591,2187.5 1603.5,2175 1869,2175 1895.47,2201.47 2243.53,2201.47 ; v1(2172,2273) 2243.53,2201.47 ; P2.7 2801.47,2201.47 2243.53,2201.47
P0_3/TX: CC2530.16 CH340C.3 P2.8 RX.K | length 3950.1
  Top Layer w6: RX.K 888.57,584.37 982.56,678.36 982.56,698.31 1025,740.75 1025,1534 1050,1559 ; v1(1040,1537) 1050,1547 1050,1559 ; CH340C.3 1050,1559 ; v1(2284.69,1953.5) 2316.31,1921.88 2316.31,1589.74 2296,1569.43 v1@2296,1459 ; v1(2298,1461) v1@2296,1459 ; CC2530.16 2354.4,1235.16 2350.25,1239.31 2302.94,1239.31 2301.24,1241 2301.24,1279.76 2255,1326 2255,1372.39 2296,1413.39 v1@2296,1459
  Bottom Layer w6: v1(1040,1537) 1113,1464 2295,1464 v1(2298,1461) ; v1(2284.69,1953.5) 2653.5,1953.5 P2.8
P0_4/BTN2: "P04 GND 5V.1" CC2530.15 D3.K P2.9 | length 3333.5
  Top Layer w6: v1(2261,1119) 2261,389 2490,160 2899,569 2975,569 2990,584 D3.K ; v1(2327,1261) 2333.16,1254.84 2348,1254.84 ; CC2530.15 2348,1254.84 ; P2.9 2701.47,2278.53 2617.03,2278.53 2601,2262.5 2601,2220.69 2328.31,1948 2328.31,1559.31 2321,1552 2321,1414.39 2267,1360.39 2267,1335.84 2348,1254.84
  Bottom Layer w6: v1(2261,1119) 2327,1185 v1(2327,1261)
P0_5/BUT3: "3V3 GND P05 P06.3" CC2530.14 P2.10 | length 3405.5
  Top Layer w6: v1(1944,2052) 1944,1944 1803,1803 1803,1512.5 1817.5,1498 1967,1498 2016,1449 2016,1200 2037,1179 2113.5,1179 v1@2130,1162.5 ; 2130,165 v1@2130,1162.5 ; v1(2130,1173) v1@2130,1162.5 ; v1(2295,1338) 2295,1324.81 2345.29,1274.53 CC2530.14
  Bottom Layer w6: v1(1944,2052) 2652,2052 P2.10 ; v1(2130,1173) v1(2295,1338)
P0_6: "3V3 GND P05 P06.4" CC2530.13 P2.11 | length 2331.2
  Top Layer w6: 2230,165 2230,1086 v1(2240,1096) ; v1(2329,1340) v1@2333.5,1340 ; CC2530.13 2343,1294.21 2333.5,1303.71 v1@2333.5,1340 ; P2.11 2340.31,1940.31 2340.31,1545.31 2333.5,1538.5 v1@2333.5,1340
  Bottom Layer w6: v1(2240,1096) 2240,1251 v1(2329,1340)
P0_7: "GND P07 3V3.2" CC2530.12 P2.12 | length 2648.6
  Top Layer w6: 1540,165 1540,659.17 v1(1873,992.17) ; CC2530.12 2359,1313.9 2350.48,1322.42 2350.48,1400.98 v1(2354.5,1405) 2352.31,1407.19 2352.31,1930.18 2562.13,2140 P2.12
  Bottom Layer w6: v1(1873,992.17) 1873,1019.59 2245.8,1392.39 2341.89,1392.39 v1(2354.5,1405)
P1_0: CC2530.11 D1.K P1.12 | length 4004.3
  Top Layer w6: CC2530.11 2379,1333.58 v1(2379,1429) ; P1.12 3528,1947 3528,1001 3510,983 D1.K
  Bottom Layer w6: v1(2379,1429) 2379,1425 2392,1412 2509,1412 2584.5,1487.5 2711.5,1487.5 2724,1500 2724,1625 2702,1647 2646,1647 2628,1665 2287.5,1665 2274,1678.5 2274,1731 2320,1732 2361,1691 2595,1691 2630,1726 2921,1726 P1.12
P1_1: CC2530.9 D2.K P1.11 | length 4880.4
  Top Layer w6: v1(2415.43,1725.43) 2384.43,1694.43 2384.43,1584.72 2426.1,1543.04 CC2530.9 ; D2.K 3255,722 3270,737 3270,928 3282,940 3282,1250 3272,1260 3272,1455 3273,1456 3406,1456 3407,1455 3407,1012.5 3418.5,1001 3467,1001 3468,1002 3468,1525 3464,1529 3464,1651 3450,1665 3421.5,1665 3362.5,1606 3274,1606 3273,1607 3273,1847.29 3274,1848.29 3351.77,1848.29 3403.35,1796.71 3455.39,1796.71 3456.68,1798 3456.68,1854 3296,2014.68 3296,2201 P1.11
  Bottom Layer w6: v1(2415.43,1725.43) 2426.5,1736.5 2504.02,1736.5 2524.59,1715.93 2571.93,1715.93 2606,1750 2845,1750 P1.11
P1_2: CC2530.8 P1.10 | length 1729.1
  Top Layer w6: CC2530.8 2445.79,1624.79 2449.67,1628.67 2449.67,1721.33 2425,1746 2425,1786 2432,1793 2468.16,1793 2493,1768.16 v1(2493,1715.5)
  Bottom Layer w6: v1(2493,1715.5) 2505.5,1703 2583,1703 2618,1738 2872.97,1738 3313.97,2179 3396,2179 P1.10
P1_3: CC2530.7 P1.9 | length 1783.5
  Top Layer w6: v1(2451,1772) 2461.67,1761.33 2461.67,1486.67 2460.5,1485.5 2460.5,1394.5 2465.47,1389.53 CC2530.7
  Bottom Layer w6: v1(2451,1772) 2463.5,1784.5 2535,1784.5 2545.5,1774 2817.5,1774 2990,1946.5 2990,2168 3000.94,2178.94 3204.58,2178.94 3284.47,2258.83 3284.47,2275 3300,2290.53 3384.47,2290.53 P1.9
P1_4/CSN: CC2530.6 DEBUG.5 P1.8 | length 3747.4
  Top Layer w6: CC2530.6 2485.16,1419 2472.5,1431.66 2472.5,1473.5 2546,1547 v1(2546,1737)
  Bottom Layer w6: DEBUG.5 1723,2307 3464,2307 3496,2275 3496,2179 ; v1(2546,1737) 2571,1762 2840,1762 3296.47,2218.47 3296.47,2262.5 3312.5,2278.53 3366.47,2278.53 3387.5,2257.5 3387.5,2210.5 3400,2198 3477,2198 3496,2179 ; P1.8 3496,2179
P1_5/SCLK: CC2530.5 DEBUG.6 P1.7 | length 5107.6
  Top Layer w6: v1(2494,1457) 2504.84,1446.16 CC2530.5
  Bottom Layer w6: DEBUG.6 DEBUG.6@1608,2115 ; v1(2494,1457) 2468.3,1482.7 1507.3,1482.7 1044,1946 1044,2098 1100,2154 1560,2154 1599,2115 DEBUG.6@1608,2115 ; P1.7 3535,2300 3516,2319 1410,2319 1391,2300 1391,2187.5 1403.5,2175 1548,2175 DEBUG.6@1608,2115
P1_6/MOSI: CC2530.38 DEBUG.8 P1.6 | length 3002.7
  Top Layer w6: CC2530.38 2640,1294.21 2657,1311.21 2657,1344.11 2651,1350.11 v1(2651,1705) v1(2651,1868)
  Bottom Layer w6: DEBUG.8 1729,1916 2603,1916 v1(2651,1868) ; v1(2651,1705) 2657,1711 2724,1711 2730,1705 2923,1705 3188,1970 3465,1970 P1.6
P1_7/MISO: CC2530.37 DEBUG.10 P1.5 | length 3294
  Top Layer w6: CC2530.37 2627,1274.53 2627.47,1275 2645,1275 2669,1299 2669,1675 2672,1678 2672,1703 ; v1(2672,1818) 2672,1703 ; v1(2697,1678) 2672,1703
  Bottom Layer w6: DEBUG.10 1721,1824 2666,1824 v1(2672,1818) ; v1(2697,1678) 2994.62,1678 3267.62,1951 3524,1951 3674,2101 3674,2201 P1.5
P2_0: CC2530.36 P1.4 R11.2 SW2.1 | length 7252.9
  Top Layer w6: R11.2 1610,1087.5 1624.5,1073 1875,1073 1894,1054 1894,865 1891,862 1891,100 1908.31,82.69 SW2.1 3095.79,64 3312.67,64 3354.35,22.31 3750.31,22.31 3776,48 3776,1085 3592,1269 3592,1338.67 3719,1465.67 3719,2124 P1.4 ; CC2530.36 2647.16,1254.84 v1(2648,1254)
  Bottom Layer w6: v1(2648,1254) 3070,1254 3100,1284 3100,1765 3274,1939 3534,1939 P1.4
P2_1/DD: CC2530.35 DEBUG.4 P1.3 | length 4882.2
  Top Layer w6: v1(1296,2236) 1313,2253 1675.5,2253 1691,2237.5 1691,2154 DEBUG.4 ; CC2530.35 2627,1235.16 2629.16,1233 2686,1233 2687,1234 2687,1562 2681,1568 2681,1621 2718,1658 2718,1699 2705.5,1711.5 v1(2705.5,1880.5)
  Bottom Layer w6: v1(1296,2236) 1393,2333 3642,2333 P1.3 ; DEBUG.4 1763,2115 1848,2030 2147,2030 2249,1928 2658,1928 v1(2705.5,1880.5)
P2_2/DC: CC2530.34 DEBUG.3 P1.2 R6.2 | length 4934.2
  Top Layer w6: v1(1558,1249) 1433.5,1249 1405.63,1276.87 R6.2 1405.63,1445.37 1382,1469 1382,1716 1653.5,1987.5 1756.5,1987.5 1769,2000 1769,2175 DEBUG.3 ; CC2530.34 2631.47,1215.47 2633,1217 2665,1217 2682,1200 2682,1157 v1(2689,1150)
  Bottom Layer w6: v1(1558,1249) 1848,959 1962.5,959 1976.5,973 1976.5,1070 2008.5,1102 2075,1102 2140,1037 2576,1037 v1(2689,1150) 3224,1150 3274.87,1200.87 3274.87,1345.71 3120,1500.58 3120,1612.5 3132.5,1625 3320,1625 P1.2
P2_3: C17.2 CC2530.33 Y2.1 | length 2217.1
  Top Layer w6: Y2.1 2488.43,2275 2519.95,2306.53 3034.97,2306.53 3079,2262.5 3079,2101 3063,2085 3063,1797 3042,1796 2984,1738 2984,1600 2971.5,1587.5 2903.13,1587.5 2890.63,1600 ; CC2530.33 2651.71,1195.79 v1(2652,1195.5) ; v1(2850,1195.5) 2850,1502 2890.63,1542.63 2890.63,1600 ; C17.2 2890.63,1600
  Bottom Layer w6: v1(2652,1195.5) v1(2850,1195.5)
P2_4: C18.2 CC2530.32 Y2.2 | length 2942.8
  Top Layer w6: Y2.2 2390,2309 2400,2319 3089,2319 3101,2307 3101,2202 3102,2201 3147.5,2201 3179,2169.5 v1(3179,1409) ; CC2530.32 2641.9,1176.1 v1(2656,1162) ; C18.2 2907,1430 2908,1429 v1(2908,1193) v1(2908,1192)
  Bottom Layer w6: v1(2656,1162) 2666.5,1172.5 2888.5,1172.5 v1(2908,1192) ; v1(2908,1193) 3215.87,1193 3262.87,1240 3262.87,1325.13 v1(3179,1409)
PL_DN: CH340C.6 R7.1 | length 1053.5
  Top Layer w6: v1(900,1589) CH340C.6 ; v1(1495,1431) 1516,1410 1516,1272 1517,1271 1550,1271 1565,1286 R7.1
  Bottom Layer w6: v1(900,1589) 1058,1431 v1(1495,1431)
PL_DP: CH340C.5 R8.1 | length 1150.3
  Top Layer w6: CH340C.5 950,1703 962.5,1715.5 v1(1019,1715.5) ; R8.1 v1(1765,1433)
  Bottom Layer w6: v1(1019,1715.5) 1019,1516 1083,1452 1516,1452 1535,1433 v1(1765,1433)
RESET: CC2530.20 DEBUG.7 P2.3 R13.2 RESET.1 | length 6072.7
  Top Layer w6: v1(2035.63,1007) v1(2035.63,1080.37) R13.2 v1(2073.13,1150) ; v1(2340,1155) 2341.42,1156.42 CC2530.20 ; v1(3188,2201) 3199,2190 3199,1482 v1(3218,1463) ; v1(3533,766) 3764,535 3764,94 3763,93 3725.79,93 RESET.1
  Bottom Layer w6: DEBUG.7 1581,2163 2597,2163 2623.47,2189.47 2989.47,2189.47 P2.3 3079,2201 v1(3188,2201) ; v1(2035.63,1007) 2109,1007 ; v1(2035.63,1080.37) 2109,1007 ; v1(2073.13,1150) 2148.13,1075 2260,1075 v1(2340,1155) ; v1(3218,1463) 3336,1345 3336,1042 3301,1007 3292,1007 ; v1(3533,766) 3292,1007 ; 2109,1007 3292,1007
VBUS: BAT/USB.1 C25.2 F1.1 | length 4459.1
  Top Layer w6: v1(2417.05,1620) F1.1 ; v1(3291,879.5) 3300.63,869.87 C25.2
  Bottom Layer w6: BAT/USB.1 1743.11,905 1763,905 ; v1(2417.05,1620) 2517,1520.05 2517,1448 2500,1431 2483,1431 2459,1455 2372.88,1455 2322.27,1404.39 1566.39,1404.39 1437.5,1275.5 1437.5,1230.5 1763,905 ; v1(3291,879.5) 3265.5,905 1763,905
pads on no net: BAT/USB.0 CH340C.7 CH340C.8 CH340C.9 CH340C.10 CH340C.11 CH340C.12 CH340C.13 CH340C.14 CH340C.15 DEBUG.9 USB.4 USB.10 USB.11 Y1.2 Y1.4

## Polygon pours and split planes (outlines as drawn)
GND on Top Layer (solid, remove dead copper, pour order 10): 0,0 3935,0 3935,2360 0,2360
GND on Bottom Layer (solid, remove dead copper, pour order 12): 0,2360 3935,2360 3935,0 0,0

## Silkscreen, mask and mechanical layers (free items; w line width, h text height)
Top Overlay:
  drawing of 5188 lines, arcs and shapes, not listed
Bottom Overlay:
  text "Narcissus" at 2690,1675 h200
  text "CQUPT" at 2710,1490 h200
  text "2018212865" at 2840,1285 h200
  text "https://github.com/NarcissusLZ/Zigbee-and-NB-Iot-for-IOT-demo" at 3420,1160 h100
Mechanical 1:
  the board outline again, w10